# EAGLE board supply_dual_v0.11-default.33fa0248 (EAGLE 7.7.0)
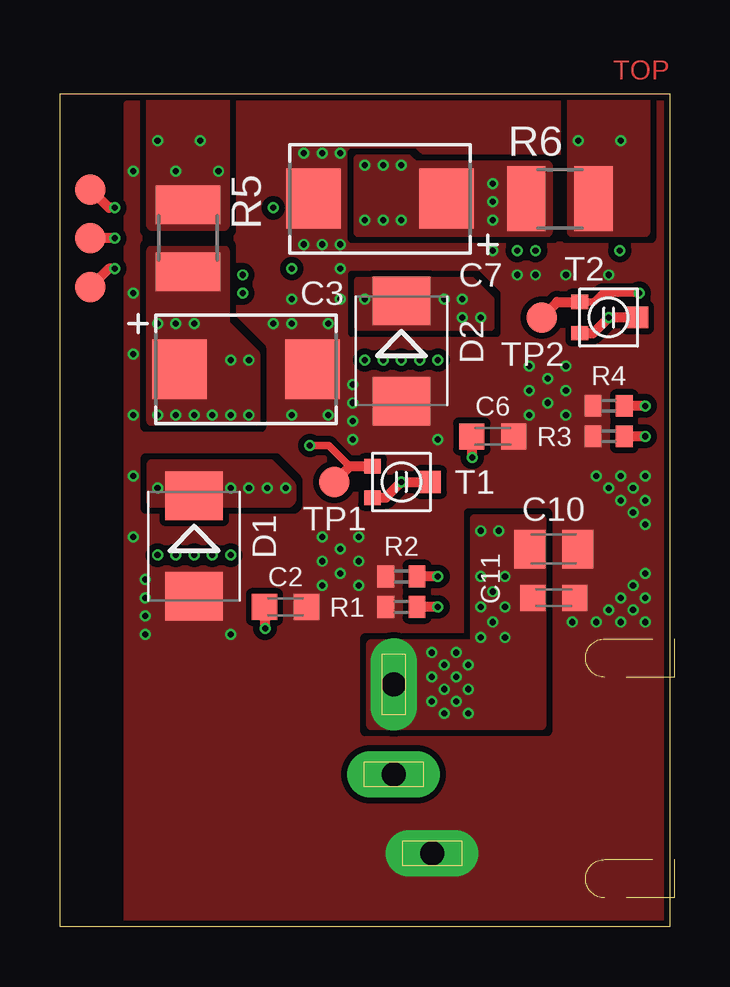
[diagram p0: board, top side]
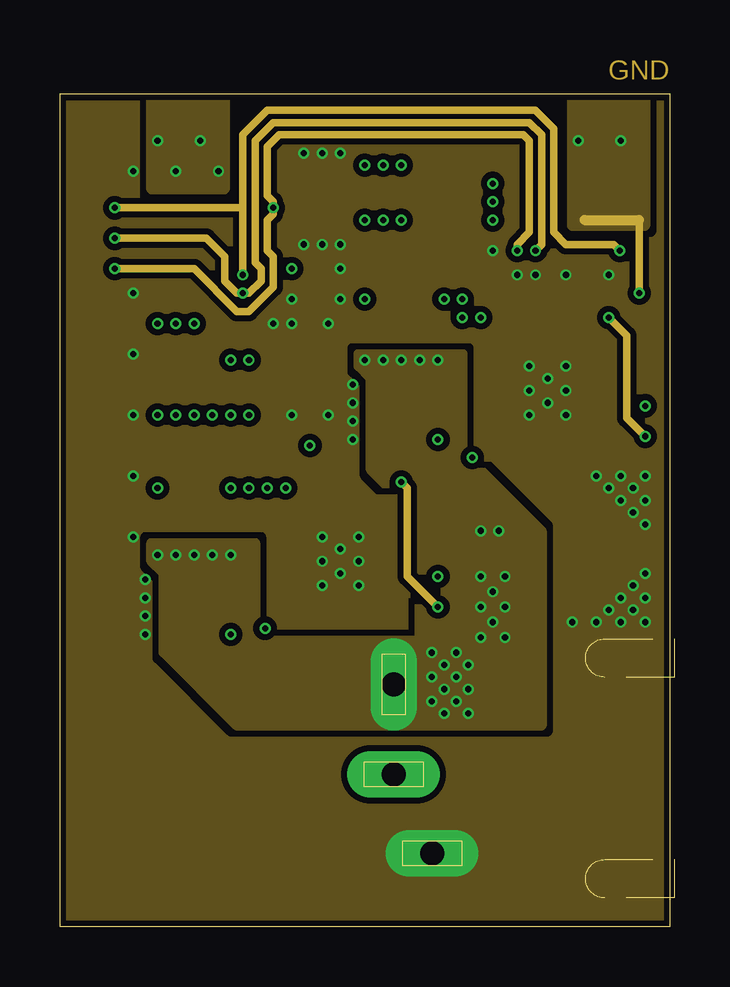
[diagram p1: board, inner layer Route2]
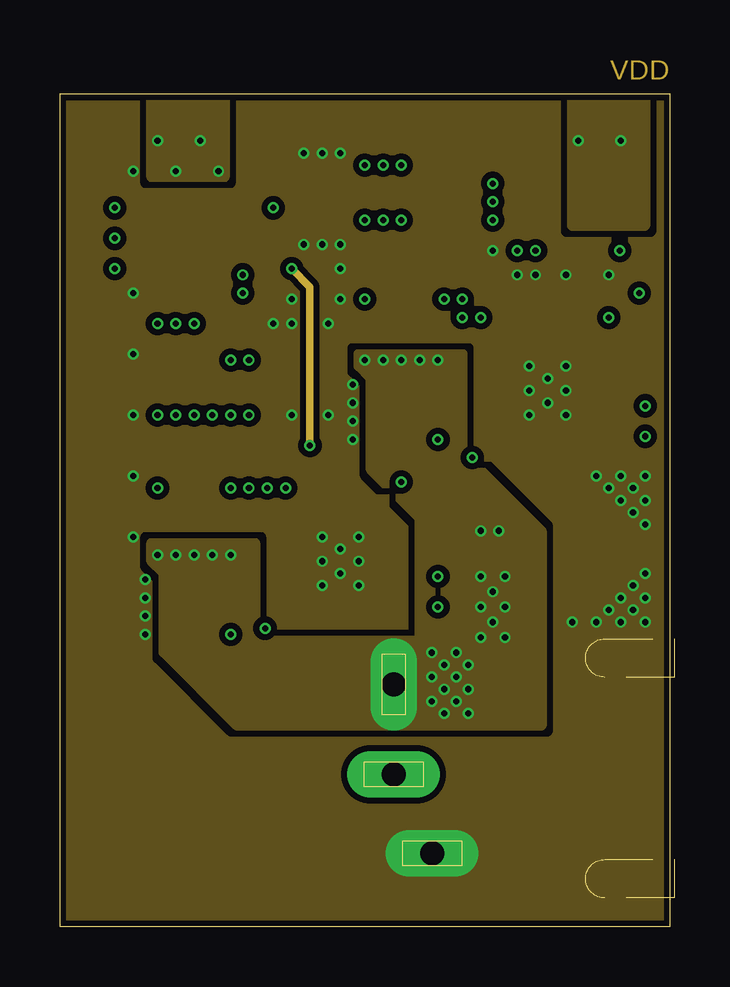
[diagram p2: board, inner layer Route15]
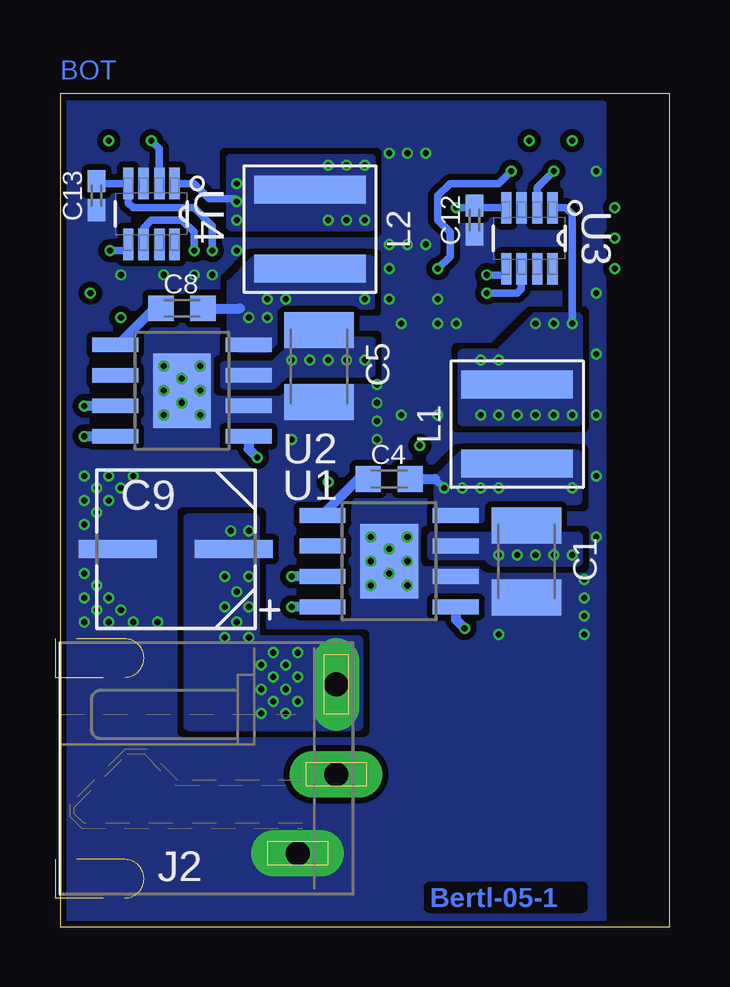
[diagram p3: board, bottom side, seen from below]

Size 25.4 x 34.73 mm. Coordinates in mm from the lower left corner, seen from the top.
Outline: 0,34.73 25.4,34.73 25.4,0 0,0 0,34.73
Copper layers (1+2*15+16): Top 0.035559375mm / dielectric 0.17018125mm / Route2 0.01778125mm / dielectric 47mil / Route15 0.01778125mm / dielectric 0.17018125mm / Bottom 0.035559375mm
Design rules "LaenPCBOrder4L_new *": minimum track width 5mil, minimum drill 10mil, track to track 5mil, track to pad 5mil, pad to pad 5mil, via to via 5mil, smd to smd 5mil, copper to edge 10mil, drill to drill 5mil, minimum pad ring 4mil, minimum via ring 4mil, stop-mask expansion 2mil, vias tented up to drill 20mil, thermal gap 8mil

## Footprints (pad centres in the part's own frame; a part is rotated, then mirrored left to right if it is on the bottom)
C1210K = smd 1.5 x 2.9: 1 -1.5,0; 2 1.5,0
C0603K = smd 1.05 x 1.08: 1 -0.875,0; 2 0.875,0
CAPT7343X430N = smd 2.261 x 2.489: 1 -2.769,0; 2 2.769,0
CAPAE660X610N = smd 3.251 x 0.762: 1 -2.413,0; 2 2.413,0
C0805K = smd 1.3 x 1.6: 1 -1,0; 2 1,0
C0402K = smd 0.925 x 0.74: 1 -0.6,0; 2 0.6,0
DO-214AA = smd 2.032 x 2.388: A 2.095,0; C -2.095,0
FC681485 = drill 1 pad 1.93 long: 1 3.5,-11.5; 2 -3.55,-9.9; 3 -0.25,-11.5
XAL50X0 = smd 1.168 x 4.648: 1 -1.651,0; 2 1.651,0
R0402 = smd 0.7 x 0.9: 1 -0.65,0; 2 0.65,0
R1210 = smd 1.6 x 2.7: 1 -1.4,0; 2 1.4,0
TRIM-PVZ2A = smd 0.6 x 0.7: 1 -0.65,-1.2; 3 0.65,-1.2 | smd 0.9 x 0.9: 2 0,1.2
B1,27 = smd 1.27 x 1.27: TP 0,0
DDA0008B = smd 1.91 x 0.61: 1 -2.78,1.905; 2 -2.78,0.635; 3 -2.78,-0.635; 4 -2.78,-1.905; 5 2.78,-1.905; 6 2.78,-0.635; 7 2.78,0.635; 8 2.78,1.905 | smd 2.41 x 3.1: EPAD 0,0
SOT65P280X145-8N = smd 1.321 x 0.432: 1 -1.27,0.965; 2 -1.27,0.33; 3 -1.27,-0.33; 4 -1.27,-0.965; 5 1.27,-0.965; 6 1.27,-0.33; 7 1.27,0.33; 8 1.27,0.965

## Placement (x,y rotation side)
C1  6µ8  [C1210K]  5.97,15.24 90 bottom
C2  1µ  [C0603K]  9.4,13.34 180 top
C3  150UF  [CAPT7343X430N]  7.75,23.24 0 top
C4  10n  [C0603K]  11.68,18.67 0 bottom
C5  6µ8  [C1210K]  14.61,23.37 90 bottom
C6  1µ  [C0603K]  18.03,20.45 180 top
C7  150UF  [CAPT7343X430N]  13.34,30.35 180 top
C8  10n  [C0603K]  20.32,25.78 0 bottom
C9  47UF  [CAPAE660X610N]  20.57,15.75 180 bottom
C10  1µ  [C0805K]  20.57,15.75 180 top
C11  100n  [C0603K]  20.57,13.72 180 top
C12  [C0402K]  8.13,29.46 270 bottom
C13  [C0402K]  23.88,30.48 270 bottom
D1  SSB4  [DO-214AA]  5.59,15.88 270 top
D2  SSB4  [DO-214AA]  14.22,24 270 top
J2  [FC681485]  25.4,6.6 90 bottom
L1  8.2µ  [XAL50X0]  6.35,20.96 90 bottom
L2  8.2µ  [XAL50X0]  14.99,29.08 90 bottom
R1  1k  [R0402]  14.22,13.34 0 top
R2  12k4  [R0402]  14.22,14.61 0 top
R3  1k  [R0402]  22.86,20.45 0 top
R4  12k4  [R0402]  22.86,21.72 0 top
R5  15m  [R1210]  5.33,28.7 90 top
R6  15m  [R1210]  20.83,30.35 0 top
T1  PVZ2A  [TRIM-PVZ2A]  14.22,18.54 270 top
T2  PVZ2A  [TRIM-PVZ2A]  22.86,25.4 270 top
TP1  TPB1,27  [B1,27]  11.43,18.54 0 top
TP2  TPB1,27  [B1,27]  20.07,25.4 0 top
TP3  TPB1,27  [B1,27]  1.27,28.7 0 top
TP4  TPB1,27  [B1,27]  1.27,30.73 0 top
TP5  TPB1,27  [B1,27]  1.27,26.67 0 top
U1  LM22670  [DDA0008B]  11.68,15.24 0 bottom
U2  LM22670  [DDA0008B]  20.32,22.35 0 bottom
U3  INA219BIDCNT  [SOT65P280X145-8N]  5.84,28.7 270 bottom
U4  INA219BIDCNT  [SOT65P280X145-8N]  21.59,29.72 270 bottom

## Library data of the parts
C1 C5 = rcl; OC_FARNELL: 1843171; REF_DESIGN: YES
C2 C6 C10 C11 = rcl; OC_FARNELL: 1759399
C3 C7 = Panasonic-EEF; MPN: EEFCX0J151R; OC_FARNELL: 1751912; OC_NEWARK: 54W2542; PACKAGE: 7343; SUPPLIER: PANASONIC; VOLTAGERATING: 6.3V
C4 C8 = rcl; OC_FARNELL: 1844133; REF_DESIGN: NO
C9 = Panasonic-EEEFT_EEEH; MPN: EEE-FT1H470AP; OC_FARNELL: 1868425; OC_NEWARK: 31T8185; PACKAGE: CASE-D; SUPPLIER: PANASONIC; TOLERANCE: ±20 %; VOLTAGERATING: 50V
C12 C13 = rcl
D1 D2 = shottky; OC_FARNELL: 1336557
J2 = dc-jack
L1 L2 = coilcraft
R1 R3 = rcl; OC_FARNELL: 2072516
R2 R4 = rcl; OC_FARNELL: 2072591
R5 R6 = rcl; OC_FARNELL: 2079441
T1 T2 = paul
TP1-TP5 = testpad
U1 U2 = lm22670; OC_FARNELL: 1679663
U3 U4 = ina219; MPN: INA219BIDCNT; OC_FARNELL: 1855125; OC_NEWARK: 12T2860; PACKAGE: SOT-23-8; SUPPLIER: TEXAS INSTRUMENTS

## Nets
+3V3: C12.1 C13.1 TP5.TP U3.4 U4.4
GND: C1.1 C2.1 C3.2 C5.1 C6.1 C7.2 C9.2 C10.1 C11.1 C12.2 C13.2 D1.A D2.A J2.2 R1.1 R2.1 R3.1 R4.1 U1.6 U1.EPAD U2.6 U2.EPAD U3.3 U4.3
L1O: C3.1 L1.2 R5.1 U3.1
L1P: C4.2 D1.C L1.1 U1.8
L2O: C7.1 L2.2 R6.1 U4.1
L2P: C8.2 D2.C L2.1 U2.8
N$1: R1.2 T1.2 T1.3 U1.4
N$3: R3.2 T2.2 T2.3 U2.4
N$5: C8.1 U2.1
N$6: R4.2 U2.3
N$7: C6.2 U2.5
N$8: U3.7
N$9: U3.8
N$10: C4.1 U1.1
N$12: R2.2 U1.3
N$13: C2.2 U1.5
N$16: U4.7
N$17: U4.8
OUT1: R5.2 T1.1 TP1.TP U3.2
OUT2: R6.2 T2.1 TP2.TP U4.2
SCL1: TP4.TP U3.5 U4.5
SDA1: TP3.TP U3.6 U4.6
VIN: C1.2 C5.2 C9.1 C10.2 C11.2 J2.1 U1.7 U2.7

## Tracks (layer width: path | path; a pad name or v marks a point on that pad's centre or on a via)
+3V3  (via drill 0.25)
  Top 0.406: v2.29,27.43 2.03,27.43 TP5.TP
  Route2 0.305: v19.05,28.19 19.05,28.45 19.56,28.96 19.56,32.77 19.3,33.02 9.14,33.02 8.64,32.51 8.64,30.48 8.89,30.23 v8.89,29.97 8.89,29.72 8.64,29.46 8.64,28.19 8.89,27.94 8.89,26.67 7.87,25.65 7.37,25.65 5.59,27.43 v2.29,27.43
  Bottom 0.305: v19.05,28.19 19.05,29.21 19.81,29.97 22.35,29.97 22.55,30.18 U4.4 23.53,30.99 C13.1 | U3.4 7.78,29.97 | 7.78,29.97 v8.89,29.97 | C12.1 7.78,29.97
GND  (via drill 0.25)
  other vias: 19.56,23.37 21.08,23.37 20.32,22.86 19.56,22.35 21.08,22.35 20.32,21.84 19.56,21.34 21.08,21.34 10.92,16.26 12.45,16.26 11.68,15.75 10.92,15.24 12.45,15.24 11.68,14.73 10.92,14.22 12.45,14.22 24.38,18.8 23.88,18.29 24.38,17.78 23.88,17.27 24.38,16.76 24.38,14.73 23.88,14.22 24.38,12.7 23.88,13.21 24.38,13.72 23.37,12.7 22.86,13.21 22.35,12.7 21.34,12.7 8.89,25.15 9.65,25.15 9.65,26.16 9.65,21.34 23.37,18.8 22.86,18.29 22.35,18.8 23.37,17.78 23.37,13.72 11.68,28.45 10.92,28.45 10.16,28.45 18.03,28.19 19.05,27.18 19.81,27.18 22.86,27.18 21.08,27.18 3.56,12.19 3.56,12.95 3.56,13.72 3.56,14.48 7.11,12.19 12.19,20.32 12.19,21.08 15.75,20.32 12.19,21.84 12.19,22.61 11.18,25.15 11.18,21.34 10.16,32.26 10.92,32.26 11.68,32.26 11.68,27.43 11.68,26.16 3.05,31.5 3.05,26.42 3.05,23.88 3.05,21.34 3.05,18.8 3.05,16.26
  pour Bottom (isolate 0.254, rank 4, no thermals): 25.4,34.29 2.79,34.29 2.79,0 25.4,0
  pour Top (isolate 0.254, rank 4, no thermals): 25.4,34.29 2.79,34.29 2.79,0 25.4,0
  pour Route2 (isolate 0.254, rank 4, no thermals): 0,34.29 0,0 25.4,0 25.4,34.29
  pour Route15 (isolate 0.254, rank 4, no thermals): 0,34.29 0,0 25.4,0 25.4,34.29
L1O  (via drill 0.25)
  Bottom 0.305: U3.1 4.32,29.97 4.06,29.72 v4.06,25.15
  other vias: 4.83,21.34 6.35,21.34 5.59,21.34 7.11,21.34 4.06,21.34 7.11,23.62 7.87,23.62 7.87,21.34 4.83,25.15 5.59,25.15
  pour Bottom (isolate 0.254, no thermals): 3.81,25.4 5.59,25.4 7.11,23.88 8.64,23.88 8.64,21.08 3.81,21.08
  pour Top (no thermals): 3.81,28.19 6.86,28.19 6.86,25.15 8.13,23.88 8.13,21.08 3.81,21.08
L1P  (via drill 0.25)
  Bottom 0.305: 9.78,18.67 v9.4,18.29
  Bottom 0.406: C4.2 9.78,18.67
  other vias: 7.87,18.29 8.64,18.29 4.06,18.29 7.11,18.29
  pour Bottom (isolate 0.254, no thermals): 8.64,19.68 9.65,18.67 9.65,17.4 9.27,17.02 7.87,17.02 7.87,17.78 3.81,17.78 3.81,19.68
  pour Top (isolate 0.254, no thermals): 3.81,19.3 8.76,19.3 9.65,18.41 9.65,17.78 9.53,17.65 3.81,17.65
L2O  (via drill 0.25)
  Bottom 0.305: v18.03,30.23 arc-90 18.16,30.35 19.17,30.35 19.81,30.99 U4.1
  other vias: 13.46,29.46 14.22,29.46 18.03,29.46 12.7,29.46 13.46,31.75 14.22,31.75 12.7,31.75 18.03,30.99
  pour Bottom (isolate 0.254, no thermals): 12.45,32 18.29,32 18.29,29.21 12.45,29.21
  pour Top (isolate 0.254, no thermals): 12.45,32 14.48,32 14.73,31.75 20.32,31.75 20.32,28.96 12.45,28.96
L2P  (via drill 0.25)
  Bottom 0.406: C8.2 17.91,25.78
  other vias: 17.53,25.4 16.76,26.16 16,26.16 12.7,26.16 16.76,25.4
  pour Bottom (isolate 0.254, no thermals): 17.28,27.81 18.29,26.8 18.29,24.51 17.91,24.13 16.76,24.13 16.51,24.38 16.51,25.91 12.45,25.91 12.45,27.81
  pour Top (isolate 0.254, no thermals): 12.45,26.92 17.13,26.92 17.91,26.15 17.91,25.02 12.45,25.02
N$1  (via drill 0.25)
  Top 0.406: v15.75,13.34 R1.2 | T1.2 v14.22,18.54 13.57,17.89 T1.3
  Route2 0.305: v15.75,13.34 14.48,14.61 14.48,18.29 v14.22,18.54
  Bottom 0.406: U1.4 v15.75,13.34
N$3  (via drill 0.25)
  Top 0.406: v24.38,20.45 R3.2 | T2.3 22.21,24.75 v22.86,25.4 T2.2
  Route2 0.305: v24.38,20.45 23.62,21.21 23.62,24.64 v22.86,25.4
  Bottom 0.406: U2.4 v24.38,20.45
N$5
  Bottom 0.406: U2.1 22.99,24.26 21.46,25.78 C8.1
N$6  (via drill 0.25)
  Top 0.406: v24.38,21.72 R4.2
  Bottom 0.406: U2.3 v24.38,21.72
N$7  (via drill 0.25)
  Top 0.406: v17.18,19.56 17.18,20.43 C6.2
  Bottom 0.406: U2.5 17.54,19.92 v17.18,19.56
N$10
  Bottom 0.406: U1.1 14.48,17.16 12.97,18.67 C4.1
N$12  (via drill 0.25)
  Top 0.406: v15.75,14.61 R2.2
  Bottom 0.406: U1.3 v15.75,14.61
N$13  (via drill 0.25)
  Top 0.406: v8.54,12.45 8.54,13.31 C2.2
  Bottom 0.406: U1.5 8.9,12.81 v8.54,12.45
OUT1  (via drill 0.25)
  Top 0.305: v10.41,20.07 11.21,20.07 12.08,19.19
  Top 0.406: T1.1 12.08,19.19 TP1.TP
  Route15 0.305: v10.41,20.07 10.41,26.67 v9.65,27.43
  Bottom 0.305: U3.2 5.51,30.81 v4.83,31.5 | v9.65,27.43 9.14,27.94 9.14,28.96 9.65,29.46 9.65,30.48 9.14,30.99 7.11,30.99 v6.6,31.5
  other vias: 4.06,32.77 5.84,32.77
  pour Top (no thermals): 6.86,29.21 3.81,29.21 3.81,34.8 6.86,34.8
  pour Route15 (no thermals): 6.86,31.24 3.81,31.24 3.81,34.8 6.86,34.8
  pour Route2 (no thermals): 6.86,30.73 3.81,30.73 3.81,34.8 6.86,34.8
OUT2  (via drill 0.25)
  Top 0.305: T2.1 22.24,26.05 22.61,26.42 v24.13,26.42
  Top 0.406: TP2.TP 20.72,26.05 T2.1
  Route2 0.305: v24.13,26.42 24.13,29.46
  Route2 0.406: 21.84,29.46 24.13,29.46
  Bottom 0.305: U4.2 21.26,32.44 v21.59,32.77
  other vias: 23.37,32.77
  pour Top (no thermals): 24.38,28.96 21.34,28.96 21.34,34.8 24.38,34.8
  pour Route15 (no thermals): 24.38,29.21 21.34,29.21 21.34,34.8 24.38,34.8
  pour Route2 (no thermals): 24.38,29.21 21.34,29.21 21.34,34.8 24.38,34.8
SCL1  (via drill 0.25)
  Top 0.406: v2.29,29.97 2.03,29.97 TP4.TP
  Route2 0.305: v23.32,28.19 23.06,28.45 21.08,28.45 20.57,28.96 20.57,33.27 19.81,34.04 8.64,34.04 7.62,33.02 7.62,29.97 | v7.62,27.18 7.62,29.97 | 7.62,29.97 v2.29,29.97
  Bottom 0.305: v23.32,28.19 22.55,28.19 U4.5 | U3.5 6.86,27.18 v7.62,27.18
SDA1  (via drill 0.25)
  Top 0.406: v2.29,28.7 TP3.TP
  Route2 0.305: v19.81,28.19 20.07,28.45 20.07,33.02 19.56,33.53 8.89,33.53 8.13,32.77 8.13,27.69 8.38,27.43 8.38,26.92 7.87,26.42 v7.62,26.42 7.37,26.42 6.86,26.92 6.86,27.94 6.1,28.7 v2.29,28.7
  Bottom 0.305: U3.6 6.17,26.59 6.35,26.42 v7.62,26.42 | U4.6 21.92,29.13 21.59,29.46 20.32,29.46 19.81,28.96 v19.81,28.19
VIN  (via drill 0.25)
  other vias: 17.53,13.34 18.54,14.61 18.54,12.07 18.29,16.51 17.53,16.51 18.03,12.7 13.46,23.62 14.22,23.62 14.99,23.62 15.75,23.62 4.83,15.49 5.59,15.49 6.35,15.49 7.11,15.49 12.7,23.62 4.06,15.49 17.53,14.61 18.54,13.34 18.03,13.97 17.53,12.07 15.49,11.43 16.51,11.43 16,10.92 17.02,10.92 15.49,10.41 16.51,10.41 16,9.91 17.02,9.91 15.49,9.4 16.51,9.4 16,8.89 17.02,8.89
  pour Bottom (no thermals): 12.45,24.38 15.49,24.38 16.51,23.37 18.54,23.37 18.54,22.61 16.51,22.61 16,23.11 12.45,23.11
  pour Bottom (isolate 0.254, no thermals): 3.81,16.26 9.91,16.26 9.91,15.49 7.62,15.49 7.37,15.24 3.81,15.24
  pour Bottom (isolate 0.254, no thermals): 17.27,17.02 20.07,17.02 20.07,8.38 12.95,8.38 12.95,11.94 17.27,11.94
  pour Route15 (isolate 0.254, no thermals): 12.45,23.88 16.76,23.88 16.76,19.81 20.07,16.51 20.07,8.38 7.37,8.38 4.32,11.43 4.32,14.73 3.81,15.24 3.81,16 8.13,16 8.13,11.94 14.99,11.94 14.99,17.02 12.95,19.05 12.95,22.86 12.45,23.37
  pour Route2 (isolate 0.254, no thermals): 12.45,23.88 16.76,23.88 16.76,19.81 20.07,16.51 20.07,8.38 7.37,8.38 4.32,11.43 4.32,14.73 3.81,15.24 3.81,16 8.13,16 8.13,11.94 14.99,11.94 14.99,17.02 12.95,19.05 12.95,22.86 12.45,23.37
  pour Top (isolate 0.254, no thermals): 17.27,17.02 20.07,17.02 20.07,8.38 12.95,8.38 12.95,11.81 17.27,11.81

## Text on the board
Top: TOP
Route2: GND
Route15: VDD
Bottom: BOT | Bertl-05-1
tStop: SMT
bStop: SMB
tCream: PMT
bCream: PMB
Reference: Bertl-05-1
bRef: Bertl-05-1
_tsilk: SLT